# Altium PCB pre_adc_pcb2.PcbDoc
Units mil, origin at the board's own origin, x right, y up, seen from the top; angles counter-clockwise.
Board outline 3115 x 1720 mil, 2 copper layers (Top Layer, Bottom Layer); 46 components, 29 nets, 153 pads, 39 vias.
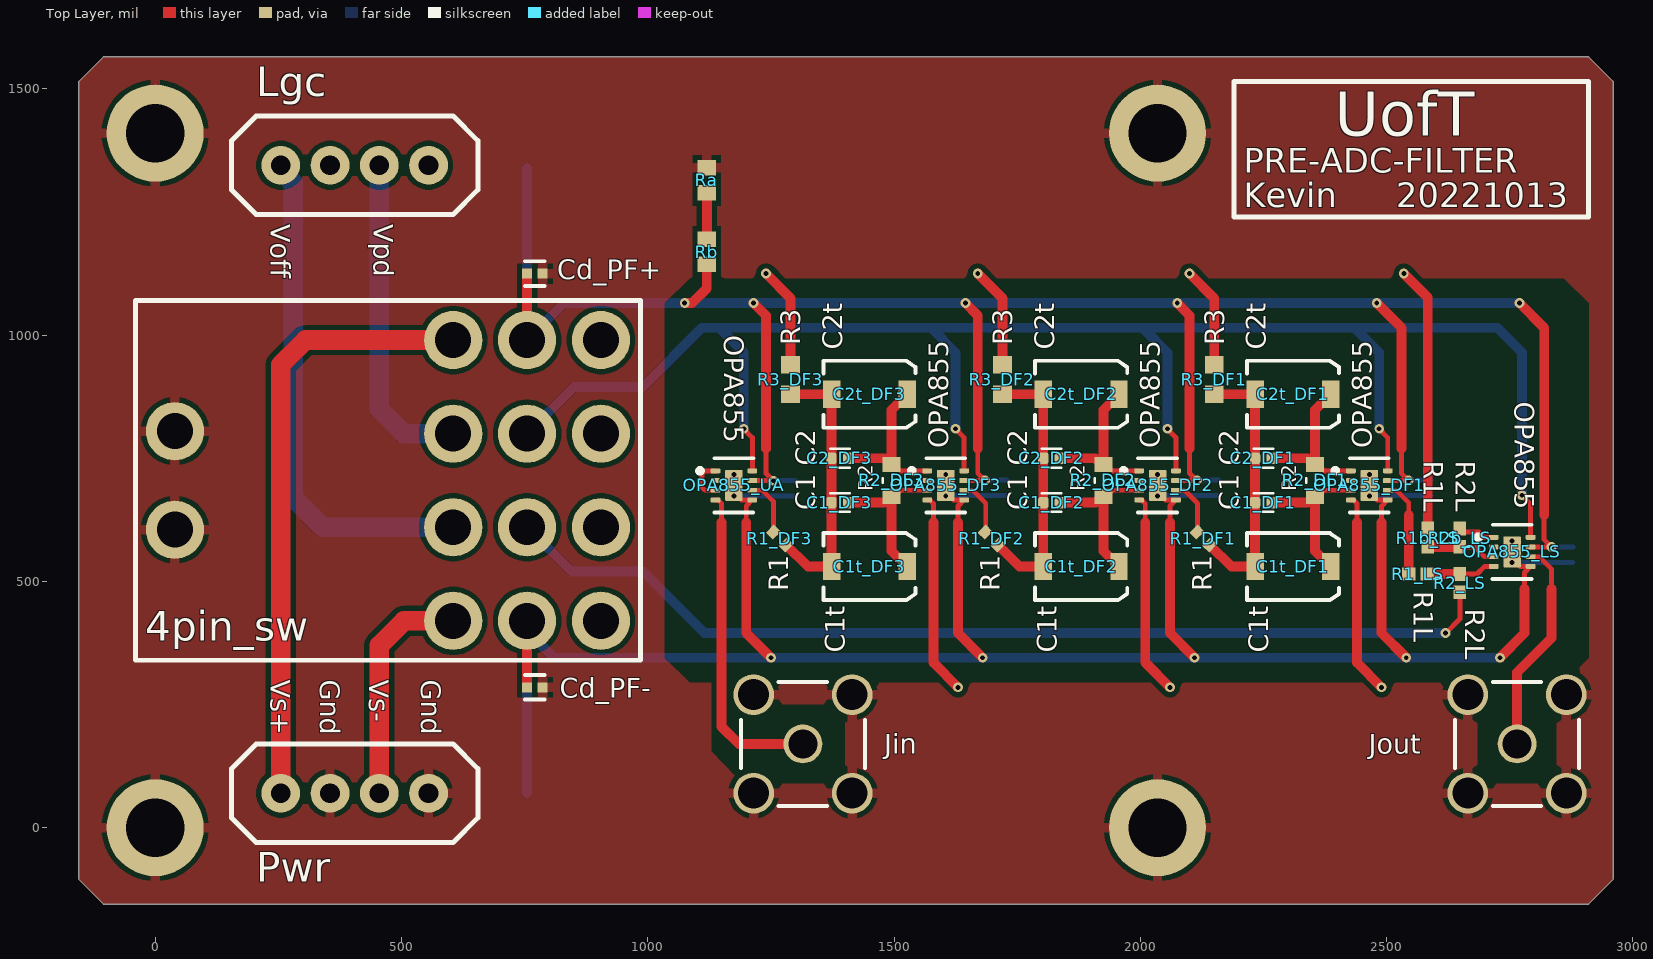
[diagram p0: Top Layer view]
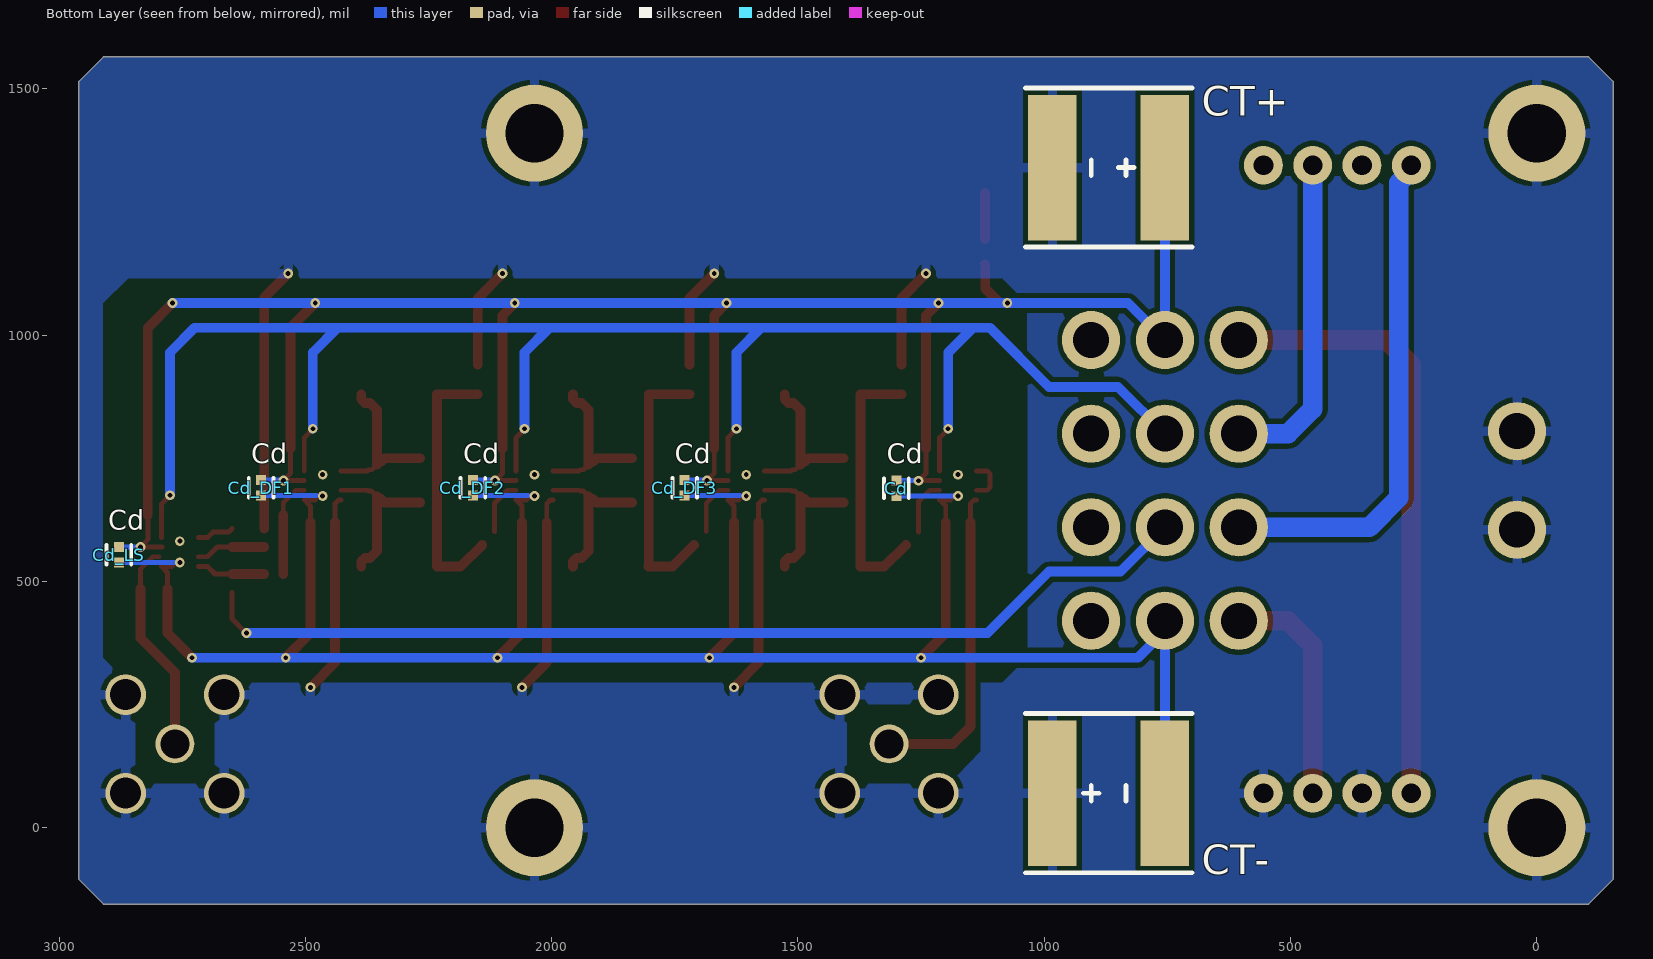
[diagram p1: Bottom Layer view, seen from below]
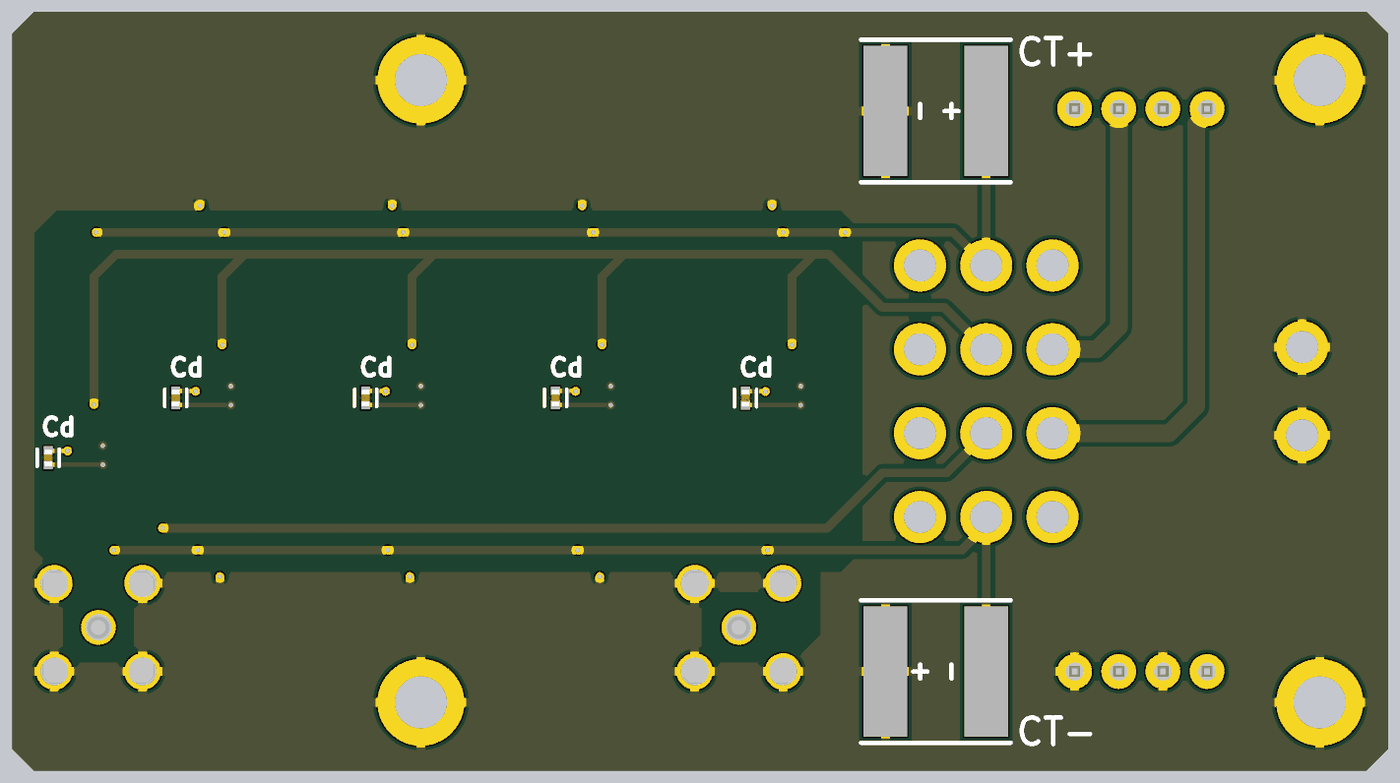
[diagram p2: 3D render of the assembled board from below, using the file's embedded part models]

## Layer stack, top to bottom
Top Solder: solder mask 0.4, Solder Resist, Dk 3.5
Top Layer: signal copper 1.4
Dielectric 1: dielectric 12.6, FR-4, Dk 4.8
Bottom Layer: signal copper 1.4
Bottom Solder: solder mask 0.4, Solder Resist, Dk 3.5

## Board outline
2960,-105 2960,1515 2910,1565 -105,1565 -155,1515 -155,-105 -105,-155 2910,-155

## Design rules (kind name [scope] priority, off if disabled: settings)
Clearance Clearance_Poly [InPolygon] p1: gap=10 ignorepadtopadclearanceinfootprint=FALSE
Clearance [All] p2: gap=5 ignorepadtopadclearanceinfootprint=FALSE
ComponentClearance [All] p1: gap=40 collisioncheckmode=3 verticalgap=40 showdistances=FALSE
HoleSize [All] p1: absolutevalues=TRUE maxlimit=100 minlimit=8 maxpercent=80.000 minpercent=20.000
PolygonConnect [All] p1: connectstyle=Relief reliefconductorwidth=20 reliefentries=4 polygonreliefangle="90 Angle" airgapwidth=10
RoomDefinition EX [InComponentClass('EX')] p1: confinementstyle=ConfineIn formatcopy=TRUE lockcomponents=FALSE outline -105,-105 1075,-105 1075,1075 1180,1075 1180,1395 1075,1395 1075,1515 -105,1515
RoomDefinition UA [InComponentClass('UA')] p2: confinementstyle=ConfineIn formatcopy=TRUE lockcomponents=FALSE outline 1090,635 1330,635 1330,755 1090,755
RoomDefinition DF3 [InComponentClass('DF3')] p3: confinementstyle=ConfineIn formatcopy=FALSE lockcomponents=FALSE outline 1364.9,450.1 1220,449.37 1220,635 1345,635 1345,850 1260,850 1260,970 1555,970 1555,754.75 1760,755.2 1760,635 1555,635 1555,451.06
RoomDefinition DF2 [InComponentClass('DF2')] p4: confinementstyle=ConfineIn formatcopy=TRUE lockcomponents=FALSE outline 1794.9,450.1 1650,449.37 1650,635 1775,635 1775,850 1690,850 1690,970 1985,970 1985,754.75 2190,755.2 2190,635 1985,635 1985,451.06
RoomDefinition LS [InComponentClass('LS')] p5: confinementstyle=ConfineIn formatcopy=TRUE lockcomponents=FALSE outline 2515,450 2910,450 2910,635 2515,635
RoomDefinition DF1 [InComponentClass('DF1')] p6: confinementstyle=ConfineIn formatcopy=TRUE lockcomponents=FALSE outline 2224.9,450.1 2080,449.37 2080,635 2205,635 2205,850 2120,850 2120,970 2415,970 2415,754.75 2620,755.2 2620,635 2415,635 2415,451.06
RoutingVias [All] p1: holewidth=10 width=20 viastyle="Through Hole" minholewidth=8 minwidth=16 maxholewidth=25 maxwidth=50
SolderMaskExpansion [All] p1: expansion=4 istentingtop=FALSE
UnRoutedNet [All] p1: checkbadconnections=TRUE
Width [All] p1: maxlimit=40 minlimit=10 preferedwidth=20
27 further rules are at their usual default settings.

## Classes and differential pairs
component class EX: 4pin_sw Cd_PF+ Cd_PF- CT+ CT- Lgc Pwr Ra Rb
channel class delyiannis_filter: DF1 DF2 DF3
component class UA: Cd OPA855_UA
component class LS: Cd_LS OPA855_LS R1_LS R1b_LS R2_LS R2b_LS y
component class DF3: C1_DF3 C1t C1t_DF3 C2_DF3 C2t_DF3 Cd_DF3 m OPA855_DF3 R1_DF3 R2_DF3 R3_DF3
component class DF2: C1_DF2 C1t_DF2 C2_DF2 C2t_DF2 Cd_DF2 OPA855_DF2 R1_DF2 R2_DF2 R3_DF2
component class DF1: C1_DF1 C1t_DF1 C2_DF1 C2t_DF1 Cd_DF1 OPA855_DF1 R1_DF1 R2_DF1 R3_DF1
component class main: J_out Jin Jout

## Components (designator, comment, footprint, x,y, rotation, side; value= is the part's Value field where it differs from the comment)
4pin_sw "1004P3T2B4M7QE" 1004P3T2B4M7QE-Footprint-1 605,420 r0 top
C1_DF1 "CC0402BRNPO9BN8R2" CAPC1005X55N 2250,660 r180 top (schematic designator C1)
C1_DF2 "CC0402BRNPO9BN8R2" CAPC1005X55N 1820,660 r180 top (schematic designator C1)
C1_DF3 "CC0402BRNPO9BN8R2" CAPC1005X55N 1390,660 r180 top (schematic designator C1)
C1t_DF1 "JZ400" FP-JZ400-MFG 2310,530 r180 top (schematic designator C1t)
C1t_DF2 "JZ400" FP-JZ400-MFG 1880,530 r180 top (schematic designator C1t)
C1t_DF3 "JZ400" FP-JZ400-MFG 1450,530 r180 top (schematic designator C1t)
C2_DF1 "CC0402BRNPO9BN8R2" CAPC1005X55N 2250,750 r180 top (schematic designator C2)
C2_DF2 "CC0402BRNPO9BN8R2" CAPC1005X55N 1820,750 r180 top (schematic designator C2)
C2_DF3 "CC0402BRNPO9BN8R2" CAPC1005X55N 1390,750 r180 top (schematic designator C2)
C2t_DF1 "JZ400" FP-JZ400-MFG 2310,880 r180 top (schematic designator C2t)
C2t_DF2 "JZ400" FP-JZ400-MFG 1880,880 r180 top (schematic designator C2t)
C2t_DF3 "JZ400" FP-JZ400-MFG 1450,880 r180 top (schematic designator C2t)
Cd "C0402C104K4RACTU" FP-C0402-BB-MFG 1300,689.37 r270 bottom value="0.10 μF"
Cd_DF1 "C0402C104K4RACTU" FP-C0402-BB-MFG 2590,690 r270 bottom value="0.10 μF" (schematic designator Cd)
Cd_DF2 "C0402C104K4RACTU" FP-C0402-BB-MFG 2160,690 r270 bottom value="0.10 μF" (schematic designator Cd)
Cd_DF3 "C0402C104K4RACTU" FP-C0402-BB-MFG 1730,690 r270 bottom value="0.10 μF" (schematic designator Cd)
Cd_LS "C0402C104K4RACTU" FP-C0402-BB-MFG 2878.7,554.25 r270 bottom value="0.10 μF"
Cd_PF+ "C0402C104K4RACTU" FP-C0402-BB-MFG 770.75,1125 r0 top value="0.10 μF"
Cd_PF- "C0402C104K4RACTU" FP-C0402-BB-MFG 770.75,285 r180 top value="0.10 μF"
CT+ "597D107X0040H2T" 597D107X0040H2T-Footprint-1 869.17,1340 r270 bottom
CT- "597D107X0040H2T" 597D107X0040H2T-Footprint-1 869.17,70 r90 bottom
Jin "5-1814832-1" TECO-5-1814832-1_V 1315,170 r90 top
Jout "5-1814832-1" TECO-5-1814832-1_V 2765,170 r90 top
Lgc "68000-204HLF" 68000-204HLF-Footprint-1 405,1345 r90 top (schematic designator 4PinLogicHeader)
OPA855_DF1 "CMP-04895-000435-1" FP-DSG0008A-MFG 2465,695 r0 top (schematic designator OPA855)
OPA855_DF2 "CMP-04895-000435-1" FP-DSG0008A-MFG 2035,695 r0 top (schematic designator OPA855)
OPA855_DF3 "CMP-04895-000435-1" FP-DSG0008A-MFG 1605,695 r0 top (schematic designator OPA855)
OPA855_LS "CMP-04895-000435-1" FP-DSG0008A-MFG 2755,560 r0 top
OPA855_UA "CMP-04895-000435-1" FP-DSG0008A-MFG 1175,695 r0 top
Pwr "68000-204HLF" 68000-204HLF-Footprint-1 405,70 r270 top (schematic designator 4PinPwrHeader)
R1_DF1 "RN73H1ETTP26R4F50" RESC1005X40N 2127.95,587.05 r315 top (schematic designator R1)
R1_DF2 "RN73H1ETTP26R4F50" RESC1005X40N 1697.95,587.05 r315 top (schematic designator R1)
R1_DF3 "RN73H1ETTP26R4F50" RESC1005X40N 1267.95,587.05 r315 top (schematic designator R1)
R1_LS "RC0402FR-07100RL" RESC1005X40X25ML05T10 2563.7,515 r0 top
R1b_LS "RC0402FR-07100RL" RESC1005X40X25ML05T10 2583.7,588.7 r270 top
R2_DF1 "RC0603FR-0753R6L" RESC1608X55N 2355,705 r90 top (schematic designator R2)
R2_DF2 "RC0603FR-0753R6L" RESC1608X55N 1925,705 r90 top (schematic designator R2)
R2_DF3 "RC0603FR-0753R6L" RESC1608X55N 1495,705 r90 top (schematic designator R2)
R2_LS "RC0402FR-07100RL" RESC1005X40X25ML05T10 2648.7,496.3 r90 top
R2b_LS "RC0402FR-07100RL" RESC1005X40X25ML05T10 2648.7,588.7 r90 top
R3_DF1 "RMCF0603FT634R" RESC1508X55N 2150,909.92 r270 top (schematic designator R3)
R3_DF2 "RMCF0603FT634R" RESC1508X55N 1720,909.92 r270 top (schematic designator R3)
R3_DF3 "RMCF0603FT634R" RESC1508X55N 1290,909.92 r270 top (schematic designator R3)
Ra "CRCW060310K0FKEA" RESC1609X50X30NL8T20 1120,1314.41 r270 top
Rb "CRCW060310K0FKEA" RESC1609X50X30NL8T20 1120,1169.41 r270 top

## Footprints (in the part's own frame and the unit in brackets; to place one, negate y for a bottom-side part, rotate by r counter-clockwise, add the part's x,y. Pads: shape width x height; smd on the part's side, far side on the other; paste and mask are expansions set on the pad)
597D107X0040H2T-Footprint-1 [mm]
  rect 7.5x2.5 smd: 1(0,2.9) 2(0,-2.9)
  silkscreen extent -4.1,-4.3 4.1,4.3
1004P3T2B4M7QE-Footprint-1 [mm]
  round 3 hole 1.854: 1(7.62,0) 2(3.81,0) 3(0,0) 4(7.62,4.826) 5(3.81,4.826) 6(0,4.826) 7(7.62,9.652) 8(3.81,9.652) 9(0,9.652) 10(7.62,14.478) 11(3.81,14.478) 12(0,14.478) 13(-14.351,9.779) 14(-14.351,4.699)
  silkscreen extent -16.38,-2.03 9.65,16.51
68000-204HLF-Footprint-1 [mm]
  round 2 hole 1.02: 1(0,3.81) 2(0,1.27) 3(0,-1.27) 4(0,-3.81)
  silkscreen extent -2.54,-6.35 2.54,6.35, body extent -1.21,-5.08 1.21,5.08, height 8.18
CAPC1005X55N [mm]
  rrect53% 0.54x0.6 smd: 1(-0.43,0) 2(0.43,0)
  silkscreen extent -0.5,-0.48 0.5,0.48
FP-C0402-BB-MFG [mm]
  rect 0.52x0.52 smd: 1(-0.4,0) 2(0.4,0)
  silkscreen extent -0.5,-0.64 0.5,0.64, body extent -0.5,-0.25 0.5,0.25, height 0.55
FP-DSG0008A-MFG [mm]
  rrect40% 0.5x0.25 smd: 1(-0.95,0.75) 2(-0.95,0.25) 3(-0.95,-0.25) 4(-0.95,-0.75) 5(0.95,-0.75) 6(0.95,-0.25) 7(0.95,0.25) 8(0.95,0.75)
  rrect11% 0.9x1.6 smd: 9(0,0)
  silkscreen extent -1.87,-1.39 1,1.4, body extent -1.3,-1.15 1.3,1.15, height 0.25
FP-JZ400-MFG [mm]
  rect 0.9x1.4 smd: 1(-1.95,0) 2(1.95,0)
  silkscreen extent -2.38,-1.73 2.38,1.73, body extent -2.5,-1.83 2.5,1.83, height 0.25
RESC1005X40N [mm]
  rect 0.51x0.6 smd: 1(-0.465,0) 2(0.465,0)
RESC1005X40X25ML05T10 [mm] "Chip Resistor, 2-Leads, Body 1.00x0.50mm, IPC Low Density"
  rect 0.7x0.65 smd: 1(-0.475,0) 2(0.475,0)
  body extent -0.53,-0.27 0.53,0.28, height 0.4
RESC1508X55N [mm]
  rect 0.9x0.97 smd: 1(-0.76,0) 2(0.76,0)
RESC1608X55N [mm]
  rect 0.79x0.93 smd: 1(-0.82,0) 2(0.82,0)
  silkscreen extent -0.11,-0.45 0.11,0.45
RESC1609X50X30NL8T20 [mm] "Chip Resistor, 2-Leads, Body 1.65x0.95mm, IPC Medium Density"
  rect 0.8x0.95 smd: 1(-0.65,0) 2(0.65,0)
  body extent -0.82,-0.48 0.82,0.48, height 0.5
TECO-5-1814832-1_V [mm] "THD, 5-Leads, Body 6.4x6.4mm, Pitch 5.08mm"
  round 2 hole 1.5: 1(0,0)
  round 2.1 hole 1.6: 2(-2.54,2.54) 3(-2.54,-2.54) 4(2.54,-2.54) 5(2.54,2.54)
  silkscreen extent -3.2,-3.2 3.2,3.2, body extent -3.21,-3.21 3.19,3.19, height 9.5

## Part data
4pin_sw: library part CMP-00001-7, "ESWCH 1004P3T2B4M7QE Switches > Toggle > Mini Toggle Switch", Current Rating=5A, Max Operating Temperature=85°C, Min Operating Temperature=-30°C, Package Quantity=1, Voltage Rating (AC)=120V, Voltage Rating (DC)=28V, Actuator Length=6.46mm, Actuator Material=Brass,Chrome, Actuator Type="Standard Round", Electrical Life=40000Cycles, Illumination Type=Non-Illuminated, Mount="Through Hole,Vertical", Packaging=Bulk, RoHS Compliant=No, Series=100, Switch Function=On-Off-On, Termination="PC Pin", Throw Configuration=4PDT
C1_DF1 C1_DF2 C1_DF3 C2_DF1 C2_DF2 C2_DF3: "KC 8,2pF 0402 0,10pF 50V NP0", Package=None, Availability=Unavailable, MP=CC0402BRNPO9BN8R2, Price=None
C1t_DF1 C1t_DF2 C1t_DF3 C2t_DF1 C2t_DF2 C2t_DF3: library part CMP-249250-000001-1, "CAP TRIMMER 8-40PF 125V SMD", Capacitance=0.00000000004F, Dielectric Material=Ceramic, Max Operating Temperature=85°C, Min Operating Temperature=-40°C, Test Frequency=1MHz, Tolerance=100%, Voltage Rating=125V, Features="General Purpose", Height=1.5mm, Length=4.5mm, Mount="Surface Mount", Packaging="Cut Tape", Q Factor=1500, Resistor Type=Ceramic, RoHS Compliant=Yes, Series=JZ, Termination=SMD/SMT, Width=3.2mm
Cd Cd_DF1 Cd_DF2 Cd_DF3 Cd_LS Cd_PF+ Cd_PF-: library part CMP-2008-02108-2, "CAP CER 0.1UF 16V X7R 0402", Capacitance="0.10 μF", Manufacturer=Kemet, Package=C0402-BB, Temperature="-55°C to +125°C", Temperature Characteristic=X7R, Temperature Coefficient=15%, Temperature Range High=+125°C, Temperature Range Low=-55°C, Tolerance=0.1, Voltage Rating="16 V", Automotive=No, Category=Cap, ComponentLink2Description=Datasheet, ComponentLink2URL=https://content.kemet.com/datasheets/KEM_C1002_X7R_SMD.pdf, Device Class L1="Passive Components", Device Class L2=Capacitors, Device Class L3="Ceramic Capacitors", Digikey Description="CAP CER 0.1UF 16V X7R 0402", Height=0.55mm, Ipc Land Pattern Name=CAPC10050X50, Lead Free=Yes, Manufacturer Part Number=C0402C104K4RACTU, Material=Ceramic, Mouser Description="Cap Ceramic 0.1uF 16V X7R 10% SMD 0402 125?C Paper T/R - Tape and Reel (Alt: C0402C104K4RAC TU)", Octopart=https://octopart.com/c0402c104k4ractu-kemet-94158, RoHS=TRUE
CT+ CT-: library part CMP-00002-5, "Solid Tantalum Chip Capacitors, Ultra-Low ESR, Conformal Coated, Maximum CV", RoHS Compliant=Yes
Jin Jout: library part CMP-2000-05415-1, "SMA Connector, Pitch 5.08 mm, 1 Position, Height 9.5 mm, Tail Length 4 mm, -65 to 165 degC, RoHS, Bulk", Frequency Max=3GHz, Manufacturer="TE Connectivity", Package Description="SMA Connector, Pitch 5.08 mm, 1 Position, Height 9.5 mm, Tail Length 4 mm", Coaxial Cable Types=-, Coaxial Termination=Solder, Connector Body Style=StraightJack, Connector Mounting=PCBMount, Connector Type=SMACoaxial, Contact Material=BerylliumCopper, Contact Plating=GoldPlatedContacts, Datasheet URL=http://www.onlinecomponents.com/productFiles/mf-AMP/eng_cd_1814832_a.pdf, Datasheet Version="Rev. B1, 03/2011", Impedance=50ohm, Manufacturer URL=http://www.te.com/, Package Reference=5-1814832-1, Product Range=ZDCSeries, SVHC=NoSVHC(15-Jun-2015)
Lgc Pwr: library part CMP-00000-2, "Conn Unshrouded Header HDR 4 POS 2.54mm Solder ST Top Entry Thru-Hole BergStik® Bulk"
OPA855_DF1 OPA855_DF2 OPA855_DF3 OPA855_LS OPA855_UA: library part CMP-007-000000-2, "IC OPAMP GP 1 CIRCUIT 8WSON", Design Item ID=CMP-04895-000435-1, RoHS Compliant=Yes, Source="Components - 05.10.22 - 21.23.SchLib"
R1_DF1 R1_DF2 R1_DF3 R3_DF1 R3_DF2 R3_DF3: Package=None, Availability=Unavailable, Price=None
  R1_DF1 R1_DF2 R1_DF3: MP=RN73H1ETTP26R4F50
  R3_DF1 R3_DF2 R3_DF3: MP=RMCF0603FT634R
R1_LS R1b_LS R2_LS R2b_LS: library part CMP-2002-07344-1, Manufacturer="Yageo / Phycomp", Part Number=RC0402FR-07100RL
R2_DF1 R2_DF2 R2_DF3: "Res Thick Film 0603 53.6 Ohm 1% 0.1W(1/10W) ?100ppm/?C Molded SMD Paper T/R", Package=None, Availability=Unavailable, MP=RC0603FR-0753R6L, Price=None
Ra Rb: library part CMP-1666-00005-4, "Chip Resistor, 10 KOhm, +/- 1%, 100 mW, -55 to 155 degC, 0603 (1608 Metric), RoHS, Tape and Reel", Manufacturer="Vishay Semiconductor", Max Operating Temperature="155 degC", Min Operating Temperature="-55 degC", Package Quantity=5000, Voltage Rating="75 V", ComponentLink1Description="Manufacturer URL", ComponentLink1URL=http://www.vishay.com/, ComponentLink2Description=Datasheet, ComponentLink2URL=https://datasheet.ciiva.com/11809/0900766b80d98afc-11809037.pdf, DatasheetVersion=06/2012, Height="0.45 mm", Length="1.55 mm", Mounting Technology="Surface Mount", PackageDescription="2-Pin Surface Mount Device, Body 1.575 x 0.85 mm", PackageReference=0603, Packaging="Tape and Reel", REACH SVHC=Unknown, RoHSCompliant=true

## Free pads (board coordinates)
  round 196.85 hole 118.11: 2(2035,0) 3(2035,1410) 4(0,0) 5(0,1410)

## Via types
v1: diameter 20, hole 10, Top Layer to Bottom Layer, 29 vias
v2: diameter 19.68, hole 10, Top Layer to Bottom Layer, 10 vias

## Nets (pads, with @x,y where several pads share a name; then routed paths per layer and width w, separated by ;. In a path a pad name is that pad's centre, name@x,y a point inside that pad or via, vN(x,y) a via of type N, cw(c..) or ccw(c..) an arc to the next point about the centre after c; other vN are vias at no path point)
4P_0.5v: 4pin_sw.6 Lgc.1 | length 1035.2
  Bottom Layer w40: Lgc.1 255,1334.52 280,1309.52 280,670 340,610 4pin_sw.6
4P_pd: 4pin_sw.9 Lgc.3 | length 665.7
  Bottom Layer w40: Lgc.3 455,850 505,800 4pin_sw.9
4P_V+: 4pin_sw.12 Pwr.4 | length 1240.7
  Top Layer w40: Pwr.4 255,940 305,990 4pin_sw.12
4P_V-: 4pin_sw.3 Pwr.2 | length 470.7
  Top Layer w40: Pwr.2 455,370 505,420 4pin_sw.3
+0.5v: 4pin_sw.5 R2_LS.1 | length 2048.5
  Top Layer w10: v1(2620,395) 2648.7,423.7 R2_LS.1
  Bottom Layer w20: 4pin_sw.5 845,520 990,520 1115,395 v1(2620,395)
+5v: 4pin_sw.11 Cd.1 Cd_DF1.1 Cd_DF2.1 Cd_DF3.1 Cd_LS.1 Cd_PF+.1 CT+.1 OPA855_DF1.7 OPA855_DF2.7 OPA855_DF3.7 OPA855_LS.7 OPA855_UA.7 Rb.2 | length 5115.1
  Top Layer w10: OPA855_UA.7 v1@1254.53,704.84 ; 1240,770 1240,719.37 v1@1254.53,704.84 ; v1(1255,704.37) v1@1254.53,704.84 ; OPA855_DF3.7 1642.48,704.92 v1(1684.84,704.92) 1670,719.76 1670,770 ; OPA855_DF2.7 2072.48,704.92 v1(2114.84,704.92) 2100,719.76 2100,770 ; OPA855_DF1.7 2502.48,704.92 v1(2544.84,704.92) 2530,719.76 2530,770 ; OPA855_LS.7@2791.1,569.84 2791.18,569.92 v1(2834.92,569.92) 2820,584.84 2820,635
  Top Layer w20: 4pin_sw.11 Cd_PF+.1 ; v1(1075,1065) 1090,1065 1119.79,1094.79 1119.79,1143.61 Rb.2 ; v1(1215,1065) 1240,1040 1240,770 ; v1(1645,1065) 1670,1040 1670,770 ; v1(2075,1065) 2100,1040 2100,770 ; v1(2480,1065) 2530,1015 2530,770 ; v1(2770,1065) 2820,1015 2820,635
  Bottom Layer w10: v1(1255,704.37) 1255.37,704.74 Cd.1@1299.63,704.74 ; v1(1684.84,704.92) 1685.67,705.75 Cd_DF3.1 ; v1(2114.84,704.92) 2115.67,705.75 Cd_DF2.1 ; v1(2544.84,704.92) 2545.67,705.75 Cd_DF1.1 ; v1(2834.92,569.92) 2834.96,569.96 Cd_LS.1 Cd_LS.1
  Bottom Layer w20: CT+.1 4pin_sw.11 830,1065 v1(1645,1065) v1(2075,1065) v1(2480,1065) v1(2770,1065)
-5v: 4pin_sw.2 Cd.2 Cd_DF1.2 Cd_DF2.2 Cd_DF3.2 Cd_LS.2 Cd_PF-.2 CT-.2 OPA855_DF1.5 OPA855_DF1.9 OPA855_DF2.5 OPA855_DF2.9 OPA855_DF3.5 OPA855_DF3.9 OPA855_LS.5 OPA855_LS.9 OPA855_UA.5 OPA855_UA.9 | length 4870.9
  Top Layer w10: v2(1175,673.35) 1182.87,673.35 1190.75,665.47 1207.64,665.47 OPA855_UA.5 1200,653.07 1200,620 ; v2(1605,673.35) 1612.87,673.35 1620.75,665.47 OPA855_DF3.5 1630,653.07 1630,620 ; v2(2035,673.35) 2042.87,673.35 2050.75,665.47 OPA855_DF2.5 2060,653.07 2060,620 ; v2(2465,673.35) 2472.87,673.35 2480.75,665.47 OPA855_DF1.5 2490,653.07 2490,620 ; OPA855_LS.9@2753.7,538.35 2762.87,538.35 2770.72,530.5 2779.94,530.5 ; 2779.96,530.47 OPA855_LS.5 2780,518.07 2780,485
  Top Layer w20: Cd_PF-.2 4pin_sw.2 ; 1200,620 1200,395 v1(1250,345) ; 1630,620 1630,395 v1(1680,345) ; 2060,620 2060,395 v1(2110,345) ; 2490,620 2490,395 v1(2540,345) ; v1(2730,345) 2780,395 2780,485
  Bottom Layer w10: v2@1175,673.62 Cd.2 ; 1617.72,674.25 Cd_DF3.2 ; 2047.72,674.25 Cd_DF2.2 ; 2477.72,674.25 Cd_DF1.2 ; v2@2753.7,538.35 v2(2755,538.35) 2755.16,538.5 Cd_LS.2
  Bottom Layer w20: CT-.2 4pin_sw.2@755,400 ; 4pin_sw.2 4pin_sw.2@755,400 ; v1(2730,345) v1(2110,345) v1(1680,345) v1(1250,345) 810,345 4pin_sw.2@755,400
  other v2: 2755,581.65 1175,716.65 1605,716.65 2035,716.65 2465,716.65
GND: 4pin_sw.13 4pin_sw.14 Cd_PF+.2 Cd_PF-.1 CT+.2 CT-.1 Jin.2 Jin.3 Jin.4 Jin.5 Jout.2 Jout.3 Jout.4 Jout.5 OPA855_DF1.4 OPA855_DF2.4 OPA855_DF3.4 pad.2 pad.3 pad.4 pad.5 Pwr.1 Pwr.3 R1b_LS.1 R3_DF1.1 R3_DF2.1 R3_DF3.1 Ra.1 | length 2382.7
  Top Layer w10: OPA855_DF3.4 1572.36,665.47 1580,657.83 1580,620 ; OPA855_DF2.4 2002.36,665.47 2010,657.83 2010,620 ; OPA855_DF1.4 2432.36,665.47 2440,657.83 2440,620
  Top Layer w20: v1(1240,1125) 1290,1075 R3_DF3.1 ; 1580,620 1580,335 v1(1630,285) ; v1(1670,1125) 1720,1075 R3_DF2.1 ; 2010,620 2010,335 v1(2060,285) ; v1(2100,1125) 2150,1075 R3_DF1.1 ; 2440,620 2440,335 v1(2490,285) ; v1(2535,1125) 2583.7,1076.3 R1b_LS.1
NetC1_DF1_1: C1_DF1.1 C1t_DF1.1 OPA855_DF1.3 R2_DF1.1 | length 332.7
  Top Layer w10: R2_DF1.1 2365.55,683.27 2372.28,683.27 2374.16,685.16 OPA855_DF1.3
  Top Layer w20: C1_DF1.1 2339.53,660 2346.69,667.17 2349.45,667.17 R2_DF1.1 2355,561.77 2369.21,547.56 2379.06,547.56 2386.77,539.84 C1t_DF1.1
NetC1_DF1_2: C1_DF1.2 C1t_DF1.2 C2_DF1.2 C2t_DF1.2 R1_DF1.2 R3_DF1.2 | length 543.5
  Top Layer w20: R1_DF1.2 2185,530 C1t_DF1.2 ; R3_DF1.2 2233.07,880 C2_DF1.2 C1_DF1.2 C1t_DF1.2@2233.07,530.16
NetC1_DF2_1: C1_DF2.1 C1t_DF2.1 OPA855_DF2.3 R2_DF2.1 | length 332.7
  Top Layer w10: R2_DF2.1 1935.55,683.27 1942.28,683.27 1944.16,685.16 OPA855_DF2.3
  Top Layer w20: C1_DF2.1 1909.53,660 1916.69,667.17 1919.45,667.17 R2_DF2.1 1925,561.77 1939.21,547.56 1949.06,547.56 1956.77,539.84 C1t_DF2.1
NetC1_DF2_2: C1_DF2.2 C1t_DF2.2 C2_DF2.2 C2t_DF2.2 R1_DF2.2 R3_DF2.2 | length 543.5
  Top Layer w20: R1_DF2.2 1755,530 C1t_DF2.2 ; R3_DF2.2 1803.07,880 C2_DF2.2 C1_DF2.2 C1t_DF2.2@1803.07,530.16
NetC1_DF3_1: C1_DF3.1 C1t_DF3.1 OPA855_DF3.3 R2_DF3.1 | length 332.7
  Top Layer w10: R2_DF3.1 1505.55,683.27 1512.28,683.27 1514.16,685.16 OPA855_DF3.3
  Top Layer w20: C1_DF3.1 1479.53,660 1486.69,667.17 1489.45,667.17 R2_DF3.1 1495,561.77 1509.21,547.56 1519.06,547.56 1526.77,539.84 C1t_DF3.1
NetC1_DF3_2: C1_DF3.2 C1t_DF3.2 C2_DF3.2 C2t_DF3.2 R1_DF3.2 R3_DF3.2 | length 543.5
  Top Layer w20: R1_DF3.2 1325,530 C1t_DF3.2 ; R3_DF3.2 1373.07,880 C2_DF3.2 C1_DF3.2 C1t_DF3.2@1373.07,530.16
NetC2_DF1_1: C2_DF1.1 C2t_DF1.1 OPA855_DF1.1 R2_DF1.2 | length 332.9
  Top Layer w10: R2_DF1.2 2365.55,726.73 2371.96,726.73 2374.16,724.53 OPA855_DF1.1
  Top Layer w20: C2_DF1.1 2339.53,750 2346.69,742.83 2349.45,742.83 R2_DF1.2 2355,848.23 2369.21,862.44 2379.06,862.44 2386.77,870.16 C2t_DF1.1
NetC2_DF2_1: C2_DF2.1 C2t_DF2.1 OPA855_DF2.1 R2_DF2.2 | length 332.9
  Top Layer w10: R2_DF2.2 1935.55,726.73 1941.96,726.73 1944.16,724.53 OPA855_DF2.1
  Top Layer w20: C2_DF2.1 1909.53,750 1916.69,742.83 1919.45,742.83 R2_DF2.2 1925,848.23 1939.21,862.44 1949.06,862.44 1956.77,870.16 C2t_DF2.1
NetC2_DF3_1: C2_DF3.1 C2t_DF3.1 OPA855_DF3.1 R2_DF3.2 | length 332.9
  Top Layer w10: R2_DF3.2 1505.55,726.73 1511.96,726.73 1514.16,724.53 OPA855_DF3.1
  Top Layer w20: C2_DF3.1 1479.53,750 1486.69,742.83 1489.45,742.83 R2_DF3.2 1495,848.23 1509.21,862.44 1519.06,862.44 1526.77,870.16 C2t_DF3.1
NetJin_1: Jin.1 OPA855_UA.4 | length 647.9
  Top Layer w10: OPA855_UA.4 1142.36,665.47 1150,657.83 1150,620
  Top Layer w20: 1150,620 1150,205 1185,170 Jin.1
NetJout_1: Jout.1 OPA855_LS.6 | length 432.1
  Top Layer w10: OPA855_LS.6@2797.24,550.08 2809.92,550.08 2835,525 2835,485
  Top Layer w20: Jout.1 2765,315 2835,385 2835,485
NetOPA855_DF1_6: OPA855_DF1.6 R1_LS.1 | length 198
  Top Layer w10: OPA855_DF1.6 2519.84,685.16 2545,660 2545,635
  Top Layer w20: R1_LS.1 2545,635
NetOPA855_DF2_6: OPA855_DF2.6 R1_DF1.1 | length 112.3
  Top Layer w10: OPA855_DF2.6 2089.84,685.16 2116.25,658.75 R1_DF1.1@2116.25,601.25
NetOPA855_DF3_6: OPA855_DF3.6 R1_DF2.1 | length 112.3
  Top Layer w10: OPA855_DF3.6 1659.84,685.16 1686.25,658.75 R1_DF2.1@1686.25,601.25
NetOPA855_LS_1: OPA855_LS.1 R2b_LS.2 | length 76.3
  Top Layer w10: R2b_LS.2 2656.1,600 2687.76,600 2698.23,589.53 OPA855_LS.1
NetOPA855_LS_3: OPA855_LS.3 R1b_LS.2 R2b_LS.1 | length 142.1
  Top Layer w10: R2b_LS.1 2679.02,570 2698.86,550.16 OPA855_LS.3
  Top Layer w20: R1b_LS.2 R2b_LS.1
NetOPA855_LS_4: OPA855_LS.4 R1_LS.2 R2_LS.2 | length 140.3
  Top Layer w10: R2_LS.2 2683.7,515 2699.17,530.47 OPA855_LS.4
  Top Layer w20: R1_LS.2@2583.7,515 R2_LS.2
NetOPA855_UA_1: OPA855_UA.1 OPA855_UA.3 | length 87.7
  Top Layer w10: OPA855_UA.3 1115.86,685.16 1110,691.02 1110,718.67 1115.86,724.53 OPA855_UA.1
NetOPA855_UA_6: OPA855_UA.6 R1_DF3.1 | length 114.5
  Top Layer w10: OPA855_UA.6 1232.34,685.16 1255,662.49 R1_DF3.1
NetRa_2: Ra.2 Rb.1 | length 93.8
  Top Layer w20: Rb.1 Ra.2
pwr_on: 4pin_sw.8 OPA855_DF1.8 OPA855_DF2.8 OPA855_DF3.8 OPA855_LS.8 OPA855_UA.8 | length 3786
  Top Layer w10: v1(1195,810) 1195,809.45 1212.4,792.05 OPA855_UA.8 ; v1(1625,810) 1625,809.45 1642.4,792.05 OPA855_DF3.8 ; v1(2055,810) 2055,809.45 2072.4,792.05 OPA855_DF2.8 ; v1(2485,810) 2485,809.45 2502.4,792.05 OPA855_DF1.8 ; v1(2775,675) 2775,674.45 2792.4,657.05 OPA855_LS.8
  Bottom Layer w20: 4pin_sw.8 850,895 990,895 1110,1015 1145,1015 ; v1(1195,810) 1195,965 1145,1015 ; v1(1625,810) 1625,965 1575,1015 ; v1(2055,810) 2055,965 2005,1015 ; v1(2485,810) 2485,965 2435,1015 ; v1(2775,675) 2775,965 2725,1015 2435,1015 ; 1145,1015 1575,1015 ; 1575,1015 2005,1015 ; 2005,1015 2435,1015
pads on no net: 4pin_sw.1 4pin_sw.4 4pin_sw.7 4pin_sw.10 Lgc.2 Lgc.4 OPA855_DF1.2 OPA855_DF2.2 OPA855_DF3.2 OPA855_LS.2 OPA855_UA.2

## Polygon pours and split planes (outlines as drawn)
GND on Bottom Layer "GND_L02_P002" (solid, pour order 2): -155,1515 -105,1565 2910,1565 2960,1515 2960,-105 2910,-155 -105,-155 -155,-105
GND on Top Layer "GND_L01_P001" (solid, pour order 1): 2960,1515 2910,1565 -105,1565 -155,1515 -155,-105 -105,-155 2910,-155 2960,-105

## Other copper
Multi-Layer:
  pour cut-out: 2910,345 2860,295 1085,295 1035,345 1035,1065 1085,1115 2860,1115 2910,1065
  pour cut-out: 2685,295 2845,295 2845,90 2685,90
  pour cut-out: 1130,155 1191.86,90 1400,90 1400,250 1170,250 1170,295 1129.61,295 1129.61,250 1130,249.61

## Silkscreen, mask and mechanical layers (free items; w line width, h text height)
Top Overlay:
  lines w10: 2190,1240 2910,1240 2910,1515 2190,1515 2190,1240
  text "UofT" at 2395,1405 h90
  text "PRE-ADC-FILTER" at 2210,1330 h50
  text "Kevin" at 2210,1260 h50
  text "20221013" at 2520,1260 h50
  text "Voff" at 235,1225 h40 r270
  text "Vpd" at 443.33,1225 h40 r270
  text "OPA855" at 1155,1000 h40 r270
  text "R3" at 1310,980 h40 r90
  text "R3" at 1740,980 h40 r90
  text "R3" at 2170,980 h40 r90
  text "C2t" at 1395,970 h40 r90
  text "C2t" at 1825,970 h40 r90
  text "C2t" at 2255,970 h40 r90
  text "OPA855" at 2760,865 h40 r270
  text "OPA855" at 1610,770 h40 r90
  text "OPA855" at 2040,770 h40 r90
  text "OPA855" at 2470,770 h40 r90
  text "R1L" at 2575,745 h40 r270
  text "R2L" at 2640,745 h40 r270
  text "C2" at 1340,735 h40 r90
  text "C2" at 1770,735 h40 r90
  text "C2" at 2200,735 h40 r90
  text "R2" at 1457,683 h30 r90
  text "R2" at 1887,683 h30 r90
  text "R2" at 2317,683 h30 r90
  text "C1" at 1340,645 h40 r90
  text "C1" at 1770,645 h40 r90
  text "C1" at 2200,645 h40 r90
  text "R1" at 1285,480 h40 r90
  text "R1" at 1715,480 h40 r90
  text "R1" at 2145,480 h40 r90
  text "R1L" at 2555,480 h40 r270
  text "R2L" at 2660,445 h40 r270
  text "C1t" at 1400,355 h40 r90
  text "C1t" at 1830,355 h40 r90
  text "C1t" at 2260,355 h40 r90
  text "Vs+" at 235,300 h40 r270
  text "Gnd" at 335,300 h40 r270
  text "Vs-" at 435,300 h40 r270
  text "Gnd" at 540,300 h40 r270
Bottom Overlay:
  text "Cd" at 1320,740 h40
  text "Cd" at 1750,740 h40
  text "Cd" at 2180,740 h40
  text "Cd" at 2610,740 h40
  text "Cd" at 2900,605 h40
Board Outline:
  the board outline again, w0